# Altium PCB PCB1.PcbDoc
Units mil, origin at the board's own origin, x right, y up, seen from the top; angles counter-clockwise.
Board outline 1405 x 1775 mil, 2 copper layers (Top Layer, Bottom Layer); 25 components, 16 nets, 97 pads, 105 vias.
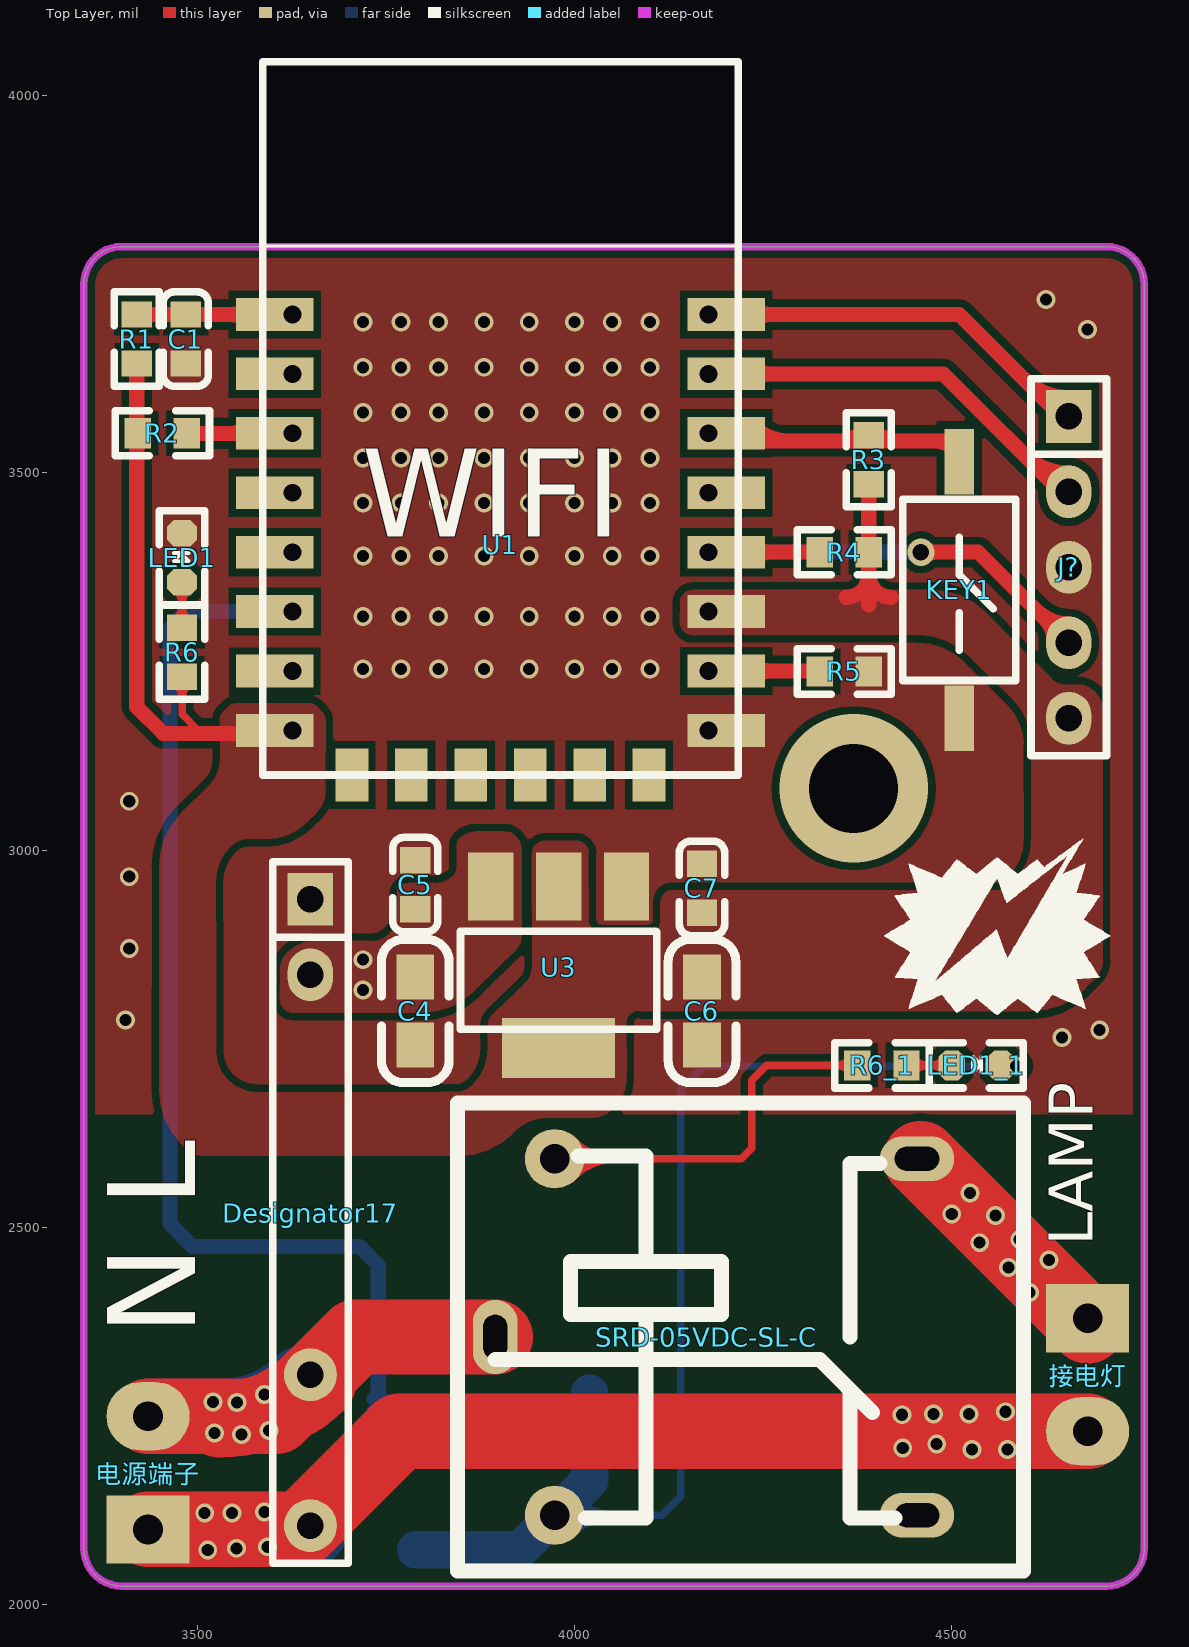
[diagram p0: Top Layer view]
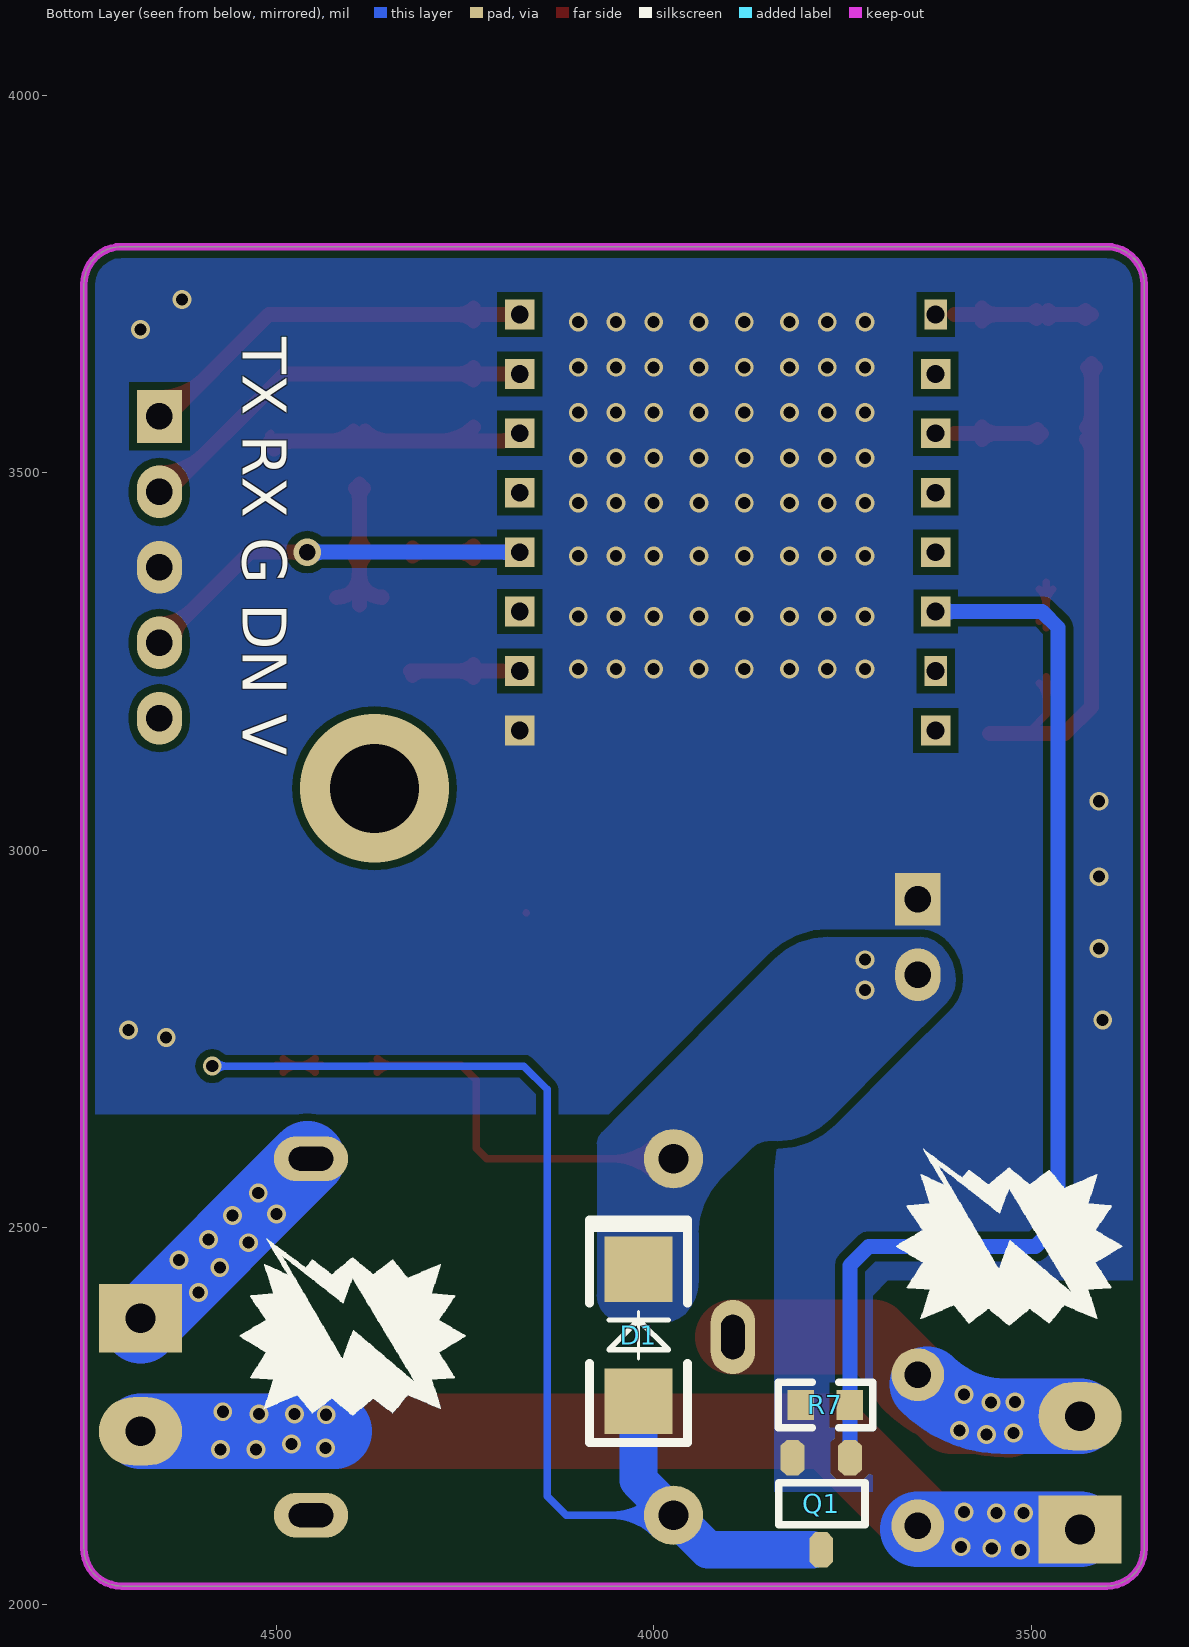
[diagram p1: Bottom Layer view, seen from below]

## Layer stack, top to bottom
Top Layer: signal copper 1.4
Dielectric: dielectric 12.6, FR-4, Dk 4.8
Bottom Layer: signal copper 1.4

## Board outline
3350,2075 ccw(c3400,2075) 3400,2025 4705,2025 ccw(c4705,2075) 4755,2075 4755,3750 ccw(c4705,3750) 4705,3800 3400,3800 ccw(c3400,3750) 3350,3750

## Design rules (kind name [scope] priority, off if disabled: settings)
Clearance [All] p1: gap=10
PlaneConnect [All] p1: planeconnectstyle=Direct reliefexpansion=20 reliefentries=4 reliefconductorwidth=10 reliefairgap=10
PolygonConnect [All] p1: connectstyle=Direct reliefconductorwidth=10 reliefentries=4 polygonreliefangle="90 Angle"
RoutingVias [All] p1: holewidth=28 width=50 viastyle="Through Hole" minholewidth=28 minwidth=50 maxholewidth=28 maxwidth=50
SilkscreenOverComponentPads [All] p1: minsilkscreentomaskgap=10
SolderMaskExpansion [All] p1: expansion=4
Width [All] p1: maxlimit=10 minlimit=10 preferedwidth=10
26 further rules are at their usual default settings.

## Components (designator, comment, footprint, x,y, rotation, side; value= is the part's Value field where it differs from the comment)
C1 "0.1U" 0603C 3485,3645 r90 top
C4 "1U" 0805C 3789,2742 r90 top
C5 "0.1U" 0603C 3789,2987 r270 top
C6 "1U" 0805C 4169,2742 r90 top
C7 "0.1U" 0603C 4169,2982 r270 top
D1 "SOD" 1411D 4020,2270 r90 bottom
Designator17 "Comment" ACDC 3650,2935 r0 top
J? "5P" SIP5 4655,3575 r0 top
KEY1 "KEY" KEY 4510,3515 r270 top
LED1 "LED" 0603D 3480,3355 r90 top
LED1_1 "LED" 0603D 4500,2715 r0 top (schematic designator LED1)
Q1 "NMOS" SOT-23-D 3740,2195 r0 bottom
R1 "10K" 0603R 3420,3710 r270 top
R2 "10K" 0603R 3486.38,3552.52 r180 top
R3 "10K" 0603R 4390,3485 r90 top
R4 "10K" 0603R 4390,3395 r180 top
R5 "10K" 0603R 4390,3237 r180 top
R6 "1K" 0603R 3480,3295 r270 top
R6_1 "1K" 0603R 4440,2715 r180 top (schematic designator R6)
R7 "10K" 0603R 3805,2265 r180 bottom
SRD-05VDC-SL-C "JIDIANQI" JDQ_S 3895,2355 r0 top
U1 "ESP8226-12F" ESP8226-12F 3626.38,3710 r0 top
U3 "AS1117-3.3V" SOT-223 4069,2952 r180 top
接电灯 "2P" KF2EDG3.81_PWR 4680,2380 r180 top
电源端子 "2P" KF2EDG3.81_PWR 3435,2100 r0 top

## Footprints (in the part's own frame and the unit in brackets; to place one, negate y for a bottom-side part, rotate by r counter-clockwise, add the part's x,y. Pads: shape width x height; smd on the part's side, far side on the other; paste and mask are expansions set on the pad)
0603C [mil]
  rect 35x40 smd: 1(0,0) 2(65,0)
  silkscreen extent -30,-30 95,30
0603D [mil]
  oct 35x40 smd: A(0,0) K(65,0)
  silkscreen extent -30,-30 95,30
0603R [mil]
  rect 35x40 smd: 1(0,0) 2(65,0)
  silkscreen extent -30,-30 95,30
0805C [mil]
  rect 60x50 smd: 1(0,0) 2(90,0)
  silkscreen extent -50,-45 140,45
1411D [mil]
  rect 86.61x90 smd: 1(0,0) 2(175,0)
  silkscreen extent -55,-65 240,65
ACDC [mil]
  rect 60x70 hole 35: 1(0,0)
  oval 60x70 hole 35: 2(0,-100)
  round 70 hole 35: 3(0,-630) 4(0,-830)
  silkscreen extent -50,-880 50,50
ESP8226-12F [mm]
  rect 2.6x1.1 smd: 1(-0.6,0) 2(-0.6,-2) 3(-0.6,-4) 4(-0.6,-6) 5(-0.6,-8) 6(-0.6,-10) 7(-0.6,-12) 8(-0.6,-14) 15(14.6,-14) 16(14.6,-12) 17(14.6,-10) 18(14.6,-8) 19(14.6,-6) 20(14.6,-4) 21(14.6,-2) 22(14.6,0)
  rect 0.762x1 hole 0.6: 1(0,0) 7(0,-12)
  rect 0.762x1 / inner rect 0.762x1 / far side rect 1x1 hole 0.6: 2(0,-2) 3(0,-4) 4(0,-6) 5(0,-8) 6(0,-10) 8(0,-14) 15(14,-14) 16(14,-12) 17(14,-10) 18(14,-8) 19(14,-6) 20(14,-4) 21(14,-2) 22(14,0)
  rect 1.1x1.8 smd: 9(2,-15.5) 10(4,-15.5) 11(6,-15.5) 12(8,-15.5) 13(10,-15.5) 14(12,-15.5)
  silkscreen extent -1,-15.5 15,8.5
JDQ_S [mm]
  round 2 hole 1: 1(2,6) 3(2,-6)
  oval 1.5x2.5 hole 0.8 slot 1.5 at 90 deg: 2(0,0)
  oval 2.5x1.5 hole 0.8 slot 1.5 at 0 deg: 4(14.2,6) 5(14.2,-6)
  silkscreen extent -1.27,-7.87 17.78,7.87
KEY [mm]
  rect 2.2x1 smd: 1(0,0) 2(8.636,0)
  silkscreen extent 1.27,-1.9 7.37,1.91
KF2EDG3.81_PWR [mm]
  rect 2.8x2.3 hole 1: 1(0,0)
  oval 2.8x2.3 hole 1: 2(0,3.81)
SIP5 [mil]
  rect 60x70 hole 35: 1(0,0)
  oval 60x70 hole 35: 2(0,-100) 3(0,-200) 4(0,-300) 5(0,-400)
  silkscreen extent -50,-450 50,50
SOT-23-D [mm]
  oct 0.8x1.2 smd: D(0.965,3.099) G(0,0) S(1.93,0)
  silkscreen extent -0.51,0.84 2.39,2.26
SOT-223 [mil]
  rect 150x80 smd: 0(90,214)
  rect 60x90 smd: 1(0,0) 2(90,0) 3(180,0)
  silkscreen extent -40,59 220,189

## Part data
C1 C4 C5 C6 C7: library part CAP1
R1 R2 R3 R4 R5 R6 R6_1 R7: library part RES

## Via types
v1: diameter 25, hole 16, Top Layer to Bottom Layer, 103 vias
v2: diameter 196.85, hole 118.11, Top Layer to Bottom Layer, 1 vias
v3: diameter 36, hole 22, Top Layer to Bottom Layer, 1 vias

## Nets (pads, with @x,y where several pads share a name; then routed paths per layer and width w, separated by ;. In a path a pad name is that pad's centre, name@x,y a point inside that pad or via, vN(x,y) a via of type N, cw(c..) or ccw(c..) an arc to the next point about the centre after c; other vN are vias at no path point)
3.3V: C6.2 C7.2 J?.5 R1.2 R2.2 R3.1 R4.1 R6.2 U1.8 U1.17 U3.0 U3.2 | length 1135.5
  Top Layer w10: R2.2@3420,3553.9 R2.2 ; R6.2@3471.16,3221.16 cw(c3449.82,3199.82) 3480,3199.82 cw(c3510.18,3199.82) R6.2@3488.84,3221.16 ; R6.2 3480,3180 3500,3160
  Top Layer w20: R1.2@3414.7,3639.7 cw(c3401.89,3626.89) 3420,3626.89 cw(c3438.11,3626.89) R1.2@3425.3,3639.7 ; 3420,3528.59 cw(c3442.81,3528.59) R2.2@3426.68,3544.72 ; 3420,3576.45 ccw(c3442.81,3576.45) R2.2@3426.68,3560.32 ; R1.2 3420,3553.9 3420,3190 3455,3155 U1.8@3555,3155 ; 4360,3335.3 ccw(c4360,3365.15) 4389.85,3365.15 ; R4.1@4384.7,3387.2 cw(c4371.89,3374.39) 4390,3374.39 cw(c4408.11,3374.39) R4.1@4395.3,3387.2 ; R4.1@4384.7,3402.8 ccw(c4371.89,3415.61) 4390,3415.61 ccw(c4408.11,3415.61) R4.1@4395.3,3402.8 ; R3.1@4384.7,3479.7 cw(c4371.89,3466.89) 4390,3466.89 cw(c4408.11,3466.89) R3.1@4395.3,3479.7 ; 4390,3325 R3.1 ; 4390.3,3365 ccw(c4420.15,3365) 4420.15,3335.15
5V: C4.2 C5.2 D1.2 Designator17.2 R6_1.2 SRD-05VDC-SL-C.1 U3.3 | length 775.4
  Top Layer w10: SRD-05VDC-SL-C.1 4221.22,2591.22 4235,2605 4235,2695 4255,2715 R6_1.2 ; SRD-05VDC-SL-C.1@3990.97,2573.99 cw(c4032.57,2532.39) 4032.57,2591.22 cw(c4032.57,2650.06) SRD-05VDC-SL-C.1@3990.97,2608.45 ; SRD-05VDC-SL-C.1@3998.04,2566.92 cw(c4056.72,2508.24) 4056.72,2591.22 cw(c4056.72,2674.2) SRD-05VDC-SL-C.1@3998.04,2615.52 ; R6_1.2@4366.16,2706.16 ccw(c4344.82,2684.82) 4344.82,2715 ccw(c4344.82,2745.18) R6_1.2@4366.16,2723.84
  other v1: 3720,2815 3720,2855
DONLOD/NDONLOD: J?.4 R4.2 U1.18 | length 899.6
  Top Layer w10: R4.2 R4.2
  Top Layer w20: U1.18@4199.8,3395.04 R4.2 ; U1.18@4238.95,3386.8 cw(c4258.84,3366.91) 4258.84,3395.04 cw(c4258.84,3423.17) U1.18@4238.95,3403.28 ; 4306.8,3395.04 cw(c4306.8,3376.8) R4.2@4319.7,3389.7 ; 4306.99,3395.04 ccw(c4306.99,3413.01) R4.2@4319.7,3400.3 ; v3(4459,3395.04) 4534.96,3395.04 J?.4 ; v3@4464.66,3389.38 cw(c4478.31,3375.73) 4478.31,3395.04 cw(c4478.31,3414.35) v3@4464.66,3400.7 ; 4612.32,3317.68 ccw(c4655,3360.36) J?.4@4655,3300 ; 4624.39,3305.61 cw(c4598.79,3280) J?.4@4635,3280
  Bottom Layer w20: U1.18@4176.18,3395.04 v3(4459,3395.04) ; U1.18@4184.41,3388.19 cw(c4200.94,3371.66) 4200.94,3395.04 cw(c4200.94,3418.42) U1.18@4184.41,3401.89 ; v3@4453.34,3389.38 ccw(c4439.69,3375.73) 4439.69,3395.04 ccw(c4439.69,3414.35) v3@4453.34,3400.7
GND: C1.1 C4.1 C5.1 C6.1 C7.1 Designator17.1 J?.3 KEY1.2 LED1.K Q1.S R5.1 R7.1 U1.15 U3.1
  other v1: 4646,2752 4696,2762 3405,2775 3410,2870 3410,2965 3410,3065 3720,3240 3770,3240 3820,3240 3880,3240 3940,3240 4000,3240 4050,3240 4100,3240 3720,3310 3770,3310 3820,3310 3880,3310 3940,3310 4000,3310 4050,3310 4100,3310 3720,3390 3770,3390 3820,3390 3880,3390 3940,3390 4000,3390 4050,3390 4100,3390 3720,3460 3770,3460 3820,3460 3880,3460 3940,3460 4000,3460 4050,3460 4100,3460 3720,3520 3770,3520 3820,3520 3880,3520 3940,3520 4000,3520 4050,3520 4100,3520 3720,3580 3770,3580 3820,3580 3880,3580 3940,3580 4000,3580 4050,3580 4100,3580 3720,3640 3770,3640 3820,3640 3880,3640 3940,3640 4000,3640 4050,3640 4100,3640 4680,3690 3720,3700 3770,3700 3820,3700 3880,3700 3940,3700 4000,3700 4050,3700 4100,3700 4625,3730
KEY: KEY1.1 R3.2 U1.20 | length 481.3
  Top Layer w10: KEY1.1@4507.48,3552.52 KEY1.1@4510,3550
  Top Layer w20: U1.20@4181.09,3551.37 ccw(c4202.46,3572.74) U1.20@4202.46,3542.52 ; U1.20@4199.8,3542.52 KEY1.1@4507.48,3542.52 ; U1.20@4238.95,3560.76 ccw(c4282.98,3604.8) 4282.98,3542.52 ; 4351.33,3542.52 ccw(c4351.33,3586.17) R3.2@4382.2,3555.3 ; R3.2@4397.8,3555.3 ccw(c4428.67,3586.17) 4428.67,3542.52 ; 4477.21,3542.52 cw(c4477.21,3505.83) KEY1.1@4503.15,3531.77
NetC1_2: C1.2 R1.1 U1.1 | length 310.9
  Top Layer w20: R1.1 U1.1@3601.38,3710 ; R1.1@3427.8,3704.7 cw(c3440.61,3691.89) 3440.61,3710 cw(c3440.61,3728.11) R1.1@3427.8,3715.3 ; C1.2@3477.2,3704.7 ccw(c3464.39,3691.89) 3464.39,3710 ccw(c3464.39,3728.11) C1.2@3477.2,3715.3 ; C1.2@3492.8,3704.7 cw(c3505.61,3691.89) 3505.61,3710 cw(c3505.61,3728.11) C1.2@3492.8,3715.3 ; U1.1@3564.99,3701.76 ccw(c3545.09,3681.87) 3545.09,3710 ccw(c3545.09,3738.13) U1.1@3564.99,3718.24
NetD1_1: D1.1 LED1_1.K Q1.D SRD-05VDC-SL-C.3 | length 1877.3
  Bottom Layer w10: SRD-05VDC-SL-C.3 4115.78,2118.78 4141,2144 4141,2683 4172,2714 v1(4585,2714) ; SRD-05VDC-SL-C.3@3990.97,2101.55 cw(c4032.57,2059.94) 4032.57,2118.78 cw(c4032.57,2177.61) SRD-05VDC-SL-C.3@3990.97,2136.01 ; SRD-05VDC-SL-C.3@3998.04,2094.48 cw(c4056.72,2035.8) 4056.72,2118.78 cw(c4056.72,2201.76) SRD-05VDC-SL-C.3@3998.04,2143.08 ; v1@4579.7,2708.7 ccw(c4566.89,2695.89) 4566.89,2714 ccw(c4566.89,2732.11) v1@4579.7,2719.3
  Bottom Layer w50: Q1.D@3790,2073 3927.96,2073 SRD-05VDC-SL-C.3 4020,2165.04 D1.1@4020,2280 ; D1.1@4007.05,2257.05 cw(c3975.8,2225.8) 4020,2225.8 cw(c4064.2,2225.8) D1.1@4032.95,2257.05
NetLED1_A: LED1.A R6.1 | length 154.8
  Top Layer w10: R6.1@3471.16,3303.84 ccw(c3449.82,3325.18) 3480,3325.18 ccw(c3510.18,3325.18) R6.1@3488.84,3303.84 ; LED1.A@3471.16,3346.16 cw(c3449.82,3324.82) 3480,3324.82 cw(c3510.18,3324.82) LED1.A@3488.84,3346.16 ; R6.1 LED1.A
NetR2_1: R2.1 U1.3 | length 187.6
  Top Layer w20: R2.1 U1.3@3601.38,3552.52 ; R2.1@3491.68,3547.22 cw(c3504.48,3534.41) 3504.48,3552.52 cw(c3504.48,3570.63) R2.1@3491.68,3557.82 ; U1.3@3564.99,3544.28 ccw(c3545.09,3524.39) 3545.09,3552.52 ccw(c3545.09,3580.65) U1.3@3564.99,3560.76
NetR5_2: R5.2 U1.16 | length 181.2
  Top Layer w20: U1.16@4201.18,3237.56 R5.2@4322.44,3237.56 ; U1.16@4238.95,3229.32 cw(c4258.84,3209.42) 4258.84,3237.56 cw(c4258.84,3265.69) U1.16@4238.95,3245.8 ; 4305.54,3237.56 cw(c4305.54,3217.54) R5.2@4319.7,3231.7
NetSRD-05VDC-SL-C_4: SRD-05VDC-SL-C.4 接电灯.1 | length 635.2
  Top Layer w10: SRD-05VDC-SL-C.4 SRD-05VDC-SL-C.4@4458.78,2591.22
  Top Layer w100: SRD-05VDC-SL-C.4@4458.78,2591.22 接电灯.1@4680,2370
  Bottom Layer w10: SRD-05VDC-SL-C.4 SRD-05VDC-SL-C.4@4458.78,2591.22
  Bottom Layer w100: SRD-05VDC-SL-C.4@4458.78,2591.22 接电灯.1@4680,2370
  other v1: 4603,2414 4575,2447 4629,2457 4537,2480 4590,2484 4558,2516 4500,2518 4524,2546
RX: J?.2 U1.21 | length 627.5
  Top Layer w20: U1.21@4199.8,3631.26 4488.74,3631.26 J?.2@4650,3470 ; U1.21@4238.95,3623.02 cw(c4258.84,3603.13) 4258.84,3631.26 cw(c4258.84,3659.39) U1.21@4238.95,3639.5 ; 4595.25,3524.75 ccw(c4655,3584.5) J?.2@4655,3500
SWITCH: Q1.G R7.2 U1.6 | length 1610.7
  Bottom Layer w10: R7.2@3740,2260 R7.2@3745,2265
  Bottom Layer w20: U1.6@3619.53,3309.45 ccw(c3603,3292.92) 3603,3316.3 ccw(c3603,3339.68) U1.6@3619.53,3323.15 ; U1.6@3626.38,3316.3 3485.3,3316.3 3464,3295 3464,2505 3494,2475 3715,2475 3740,2450 R7.2 ; R7.2@3734.7,2257.2 cw(c3721.89,2244.39) 3740,2244.39 cw(c3758.11,2244.39) R7.2@3745.3,2257.2 ; R7.2@3734.7,2272.8 ccw(c3721.89,2285.61) 3740,2285.61 ccw(c3758.11,2285.61) R7.2@3745.3,2272.8 ; Q1.G R7.2@3740,2260
TX: J?.1 U1.22 | length 625.8
  Top Layer w20: U1.22@4199.8,3710 4510,3710 J?.1@4655,3565 ; U1.22@4238.95,3701.76 cw(c4258.84,3681.87) 4258.84,3710 cw(c4258.84,3738.13) U1.22@4238.95,3718.24 ; 4595.25,3624.75 ccw(c4655,3684.5) J?.1@4655,3600
火线: Designator17.3 SRD-05VDC-SL-C.2 电源端子.2 | length 969.9
  Top Layer w100: 电源端子.2 3605,2250 3710,2355 SRD-05VDC-SL-C.2 ; 3529.84,2245.28 ccw(c3529.84,2415.32) Designator17.3@3650.08,2295.08 ; 3553.43,2250 ccw(c3553.43,2401.57) Designator17.3@3660.61,2294.39
  Bottom Layer w100: 电源端子.2 3534.9,2250 ccw(c3534.9,2395.1) Designator17.3@3637.5,2292.5
  other v1: 3559,2226 3523,2228 3595,2231 3553,2268 3521,2269 3589,2279
零线: Designator17.4 接电灯.2 电源端子.1 | length 1784.3
  Top Layer w100: 电源端子.1 3638,2100 3768,2230 接电灯.2
  Bottom Layer w10: 电源端子.1 cw(c3447.07,2087.93) 电源端子.1@3447.07,2105
  Bottom Layer w100: 电源端子.1 Designator17.4@3650,2100 ; 4423,2230 接电灯.2
  other v1: 3514,2073 3552,2075 3593,2077 3510,2122 3546,2122 3589,2123 4527,2206 4574,2206 4435,2208 4480,2213 4434,2252 4476,2253 4523,2253 4571,2256
pads on no net: LED1_1.A R6_1.1 SRD-05VDC-SL-C.5 U1.2 U1.4 U1.5 U1.7 U1.9 U1.10 U1.11 U1.12 U1.13 U1.14 U1.19
copper on no net: | length 154.8
  Top Layer w10: 4440,2715 4500,2715 ; 4448.84,2706.16 cw(c4470.18,2684.82) 4470.18,2715 cw(c4470.18,2745.18) 4448.84,2723.84 ; 4491.16,2706.16 ccw(c4469.82,2684.82) 4469.82,2715 ccw(c4469.82,2745.18) 4491.16,2723.84
  other v2: 4370,3082

## Polygon pours and split planes (outlines as drawn)
GND on Top Layer "Top Layer-No Net" (solid, remove dead copper): 3350,3800 4760,3800 4760,2655 4755,2650 3350,2650 3350,3800
3.3V on Top Layer "Top Layer-No Net" (solid, remove dead copper): 3913.09,2803.36 3890.04,2780.31 ccw(c3900.67,2769.67) 3885.64,2769.67 3885.64,2735.74 ccw(c3930.13,2735.74) 3898.67,2704.28 ccw(c3898.67,2729.91) 3916.79,2711.79 3935,2730 ccw(c3922.93,2742.07) 3940,2742.07 3940,2795 ccw(c3919.82,2774.82) 3919.82,2803.36 3913.09,2803.36
3.3V on Top Layer "Top Layer-No Net" (solid, remove dead copper): 3892.68,2781.43 ccw(c3911.31,2762.79) 3884.96,2762.79 3884.96,2737.4 cw(c3817.6,2737.4) 3865.23,2689.77 cw(c3841.64,2713.36) 3841.64,2680 3820,2680 3580.31,2680 cw(c3580.31,2736.17) 3540.6,2696.45 cw(c3578.25,2734.1) 3525,2734.1 3525,2855 3525,2957.43 cw(c3592.57,2957.43) 3544.79,3005.21 cw(c3568.43,2981.57) 3568.43,3015 3590.7,3015 ccw(c3590.7,3094.14) 3646.66,3038.18 3656.48,3048 ccw(c3623.73,3080.75) 3670.05,3080.75 3670.05,3086.9 3670.05,3172.96 ccw(c3655.73,3172.96) 3665.85,3183.08 3657.61,3191.32 ccw(c3648.74,3182.45) 3648.74,3195 3551.43,3195 ccw(c3551.43,3194.74) 3551.24,3194.92 ccw(c3551.24,3181.37) 3541.66,3190.95 3540.47,3189.77 3534.27,3183.56 ccw(c3544.57,3173.26) 3530,3173.26 3530,3119.15 cw(c3484.39,3119.15) 3516.64,3086.9 3479.29,3049.55 ccw(c3550,2978.84) 3450,2978.84 3450,2955 3450,2681.42 ccw(c3550,2681.42) 3479.29,2610.71 3485,2605 ccw(c3509.14,2629.14) 3509.14,2595 3550,2595 3846.96,2595 ccw(c3846.96,2695) 3917.67,2624.29 3920.41,2627.03 cw(c3964.68,2582.76) 3964.68,2645.36 3969.11,2645.36 4020.17,2645.36 ccw(c4020.17,2691.31) 4052.66,2658.82 ccw(c4013.55,2697.93) 4068.86,2697.93 4068.86,2699.98 4068.86,2732.29 ccw(c4001.41,2732.29) 4049.11,2779.99 ccw(c4037.01,2767.89) 4037.01,2785 3965,2785 3903.67,2785 ccw(c3903.67,2767.89) 3891.57,2779.99
3.3V on Top Layer "Top Layer-No Net" (solid, remove dead copper, pour order 1001): 4086.88,2786.91 4605.48,2786.91 ccw(c4605.48,2886.91) 4676.2,2816.2 4690,2830 ccw(c4665.86,2854.14) 4700,2854.14 4700,2875 4700,3175 4700,3185.86 ccw(c4665.86,3185.86) 4690,3210 ccw(c4665.86,3185.86) 4665.86,3220 4650,3220 cw(c4650,3244.14) 4632.93,3227.07 4590,3270 4544.29,3315.71 ccw(c4473.58,3245) 4473.58,3345 4440,3345 4157.07,3345 ccw(c4157.07,3327.93) 4145,3340 4143.54,3338.54 ccw(c4152.07,3330) 4140,3330 4140,3302.07 ccw(c4157.07,3302.07) 4145,3290 ccw(c4157.07,3302.07) 4157.07,3285 4160,3285 4453.58,3285 cw(c4453.58,3185) 4524.29,3255.71 4530,3250 4580.25,3199.75 cw(c4520.5,3140) 4605,3140 4605,3015.36 cw(c4519.64,3015.36) 4580,2955 cw(c4561.46,2973.54) 4561.46,2947.32 4192.74,2947.32 4130.26,2947.32 ccw(c4130.26,2930.74) 4118.54,2942.46 ccw(c4129.98,2931.02) 4113.8,2931.02 4113.8,2922.85 4113.8,2904.2 cw(c4111.91,2904.2) 4113.25,2902.87 cw(c4107.1,2902.87) 4111.44,2898.52 4109.38,2896.46 cw(c4096.99,2908.85) 4096.99,2891.32 4096.93,2891.32 4036.07,2891.32 cw(c4036.07,2909.07) 4023.52,2896.52 cw(c4035.21,2908.21) 4018.68,2908.21 4018.68,2908.26 4018.68,2994.98 cw(c4019.75,2994.98) 4019,2995.74 ccw(c4002.05,2995.74) 4014.03,3007.72 4013.92,3007.83 ccw(c4002.42,2996.34) 4002.42,3012.59 4002.26,3012.59 3959.87,3012.59 ccw(c3959.87,3011.49) 3959.09,3012.27 ccw(c3959.09,2999.25) 3949.88,3008.46 3947.83,3006.4 ccw(c3957.85,2996.39) 3943.68,2996.39 3943.68,2995.74 3943.68,2844.24 cw(c3941.33,2844.24) 3942.99,2842.58 cw(c3919.85,2842.58) 3936.21,2826.21 3930,2820 3903.25,2793.25 ccw(c3914.02,2782.48) 3898.79,2782.48 3898.79,2694.49 ccw(c3905.59,2694.49) 3900.78,2689.69 ccw(c3907.72,2696.63) 3907.72,2686.81 3907.76,2686.81 4054.82,2686.81 ccw(c4054.82,2698.49) 4063.08,2690.23 ccw(c4048.64,2704.68) 4069.06,2704.68 4069.06,2704.76 4069.06,2771.72 cw(c4084.28,2771.72) 4073.52,2782.48 cw(c4085.09,2770.91) 4085.09,2787.27 4086,2787.27
5V on Top Layer "Top Layer-No Net" (solid, remove dead copper, pour order 1000): 3625,2785 3797.02,2785 ccw(c3797.02,2885) 3867.73,2814.29 3922.95,2869.51 ccw(c3905.92,2886.54) 3930,2886.54 3930,2925 3930,2999.68 ccw(c3903.19,2999.68) 3922.15,3018.63 ccw(c3906.77,3003.26) 3906.77,3025 3900,3025 3870.16,3025 ccw(c3870.16,2992.59) 3847.24,3015.51 ccw(c3855.62,3007.12) 3843.76,3007.12 3843.76,3007 3843.76,2979.64 ccw(c3844.57,2979.64) 3844,2979.07 3844,2978.42 cw(c3827.52,2978.42) 3839.17,2966.76 cw(c3814.89,2991.05) 3814.89,2956.71 3814.86,2956.71 3779.55,2956.71 ccw(c3779.55,2941.45) 3768.76,2952.24 ccw(c3777.85,2943.15) 3765,2943.15 3765,2930 3765,2914.14 cw(c3730.86,2914.14) 3755,2890 cw(c3730.86,2914.14) 3730.86,2880 3710,2880 3656.21,2880 ccw(c3656.21,2828.79) 3620,2865 ccw(c3644.14,2840.86) 3610,2840.86 3610,2840 3610,2802.07 ccw(c3627.07,2802.07) 3615,2790 3616.46,2788.54 ccw(c3625,2797.07) 3625,2785
GND on Bottom Layer "Top Layer-No Net" (solid, remove dead copper): 3350,3800 4760,3800 4760,2655 4755,2650 3840,2650 3840,2150 3710,2150 3710,2410 3690,2430 3350,2430 3350,3800
5V on Bottom Layer "Top Layer-No Net" (solid, remove dead copper, pour order 1003): 4075.05,2419.25 4075.05,2610.66 ccw(c4074.76,2610.66) 4074.97,2610.87 ccw(c4052.85,2610.87) 4068.49,2626.51 4040.8,2654.2 3839.29,2855.71 ccw(c3768.58,2785) 3768.58,2885 3695,2885 3646.49,2885 ccw(c3646.49,2847.45) 3619.93,2874 3618.1,2872.17 ccw(c3661.81,2828.47) 3600,2828.47 ccw(c3644.59,2828.47) 3613.06,2796.94 3675,2735 3765.71,2644.29 ccw(c3836.42,2715) 3836.42,2615 3845,2615 cw(c3845,2578.79) 3870.61,2604.39 3890,2585 3911.19,2563.81 cw(c3840.48,2493.09) 3940.48,2493.09 3940.48,2461.53 3940.48,2429.44 ccw(c4002.41,2429.44) 3958.62,2385.65 ccw(c3984.33,2411.37) 3984.33,2375 3995,2375 4041.22,2375 ccw(c4041.22,2407.08) 4063.91,2384.4 ccw(c4037,2411.3) 4075.05,2411.3 4075.05,2419.25

## Keep-outs
Keep-Out Layer:
  the board outline again, w10

## Silkscreen, mask and mechanical layers (free items; w line width, h text height)
Top Overlay:
  drawing of 903 lines, arcs and shapes, not listed
  text "WIFI" at 3718,3377 h200
  text "LAMP" at 4706,2476 h100 r90
  text "N L" at 3536,2357 h200 r90
Bottom Overlay:
  drawing of 1806 lines, arcs and shapes, not listed
  text "TX RX G DN V" at 4564,3680 h100 r90